# Altium PCB XL991XT10W.PcbDoc (part 1 of 2)
Units mm, origin at the board's own origin, x right, y up, seen from the top; angles counter-clockwise.
Board outline 52.36 x 73.42 mm, 5 copper layers (Top Layer, Mid-Layer 2, Mid-Layer 6, Mid-Layer 13, Bottom Layer); 103 components, 66 nets, 312 pads, 177 vias.
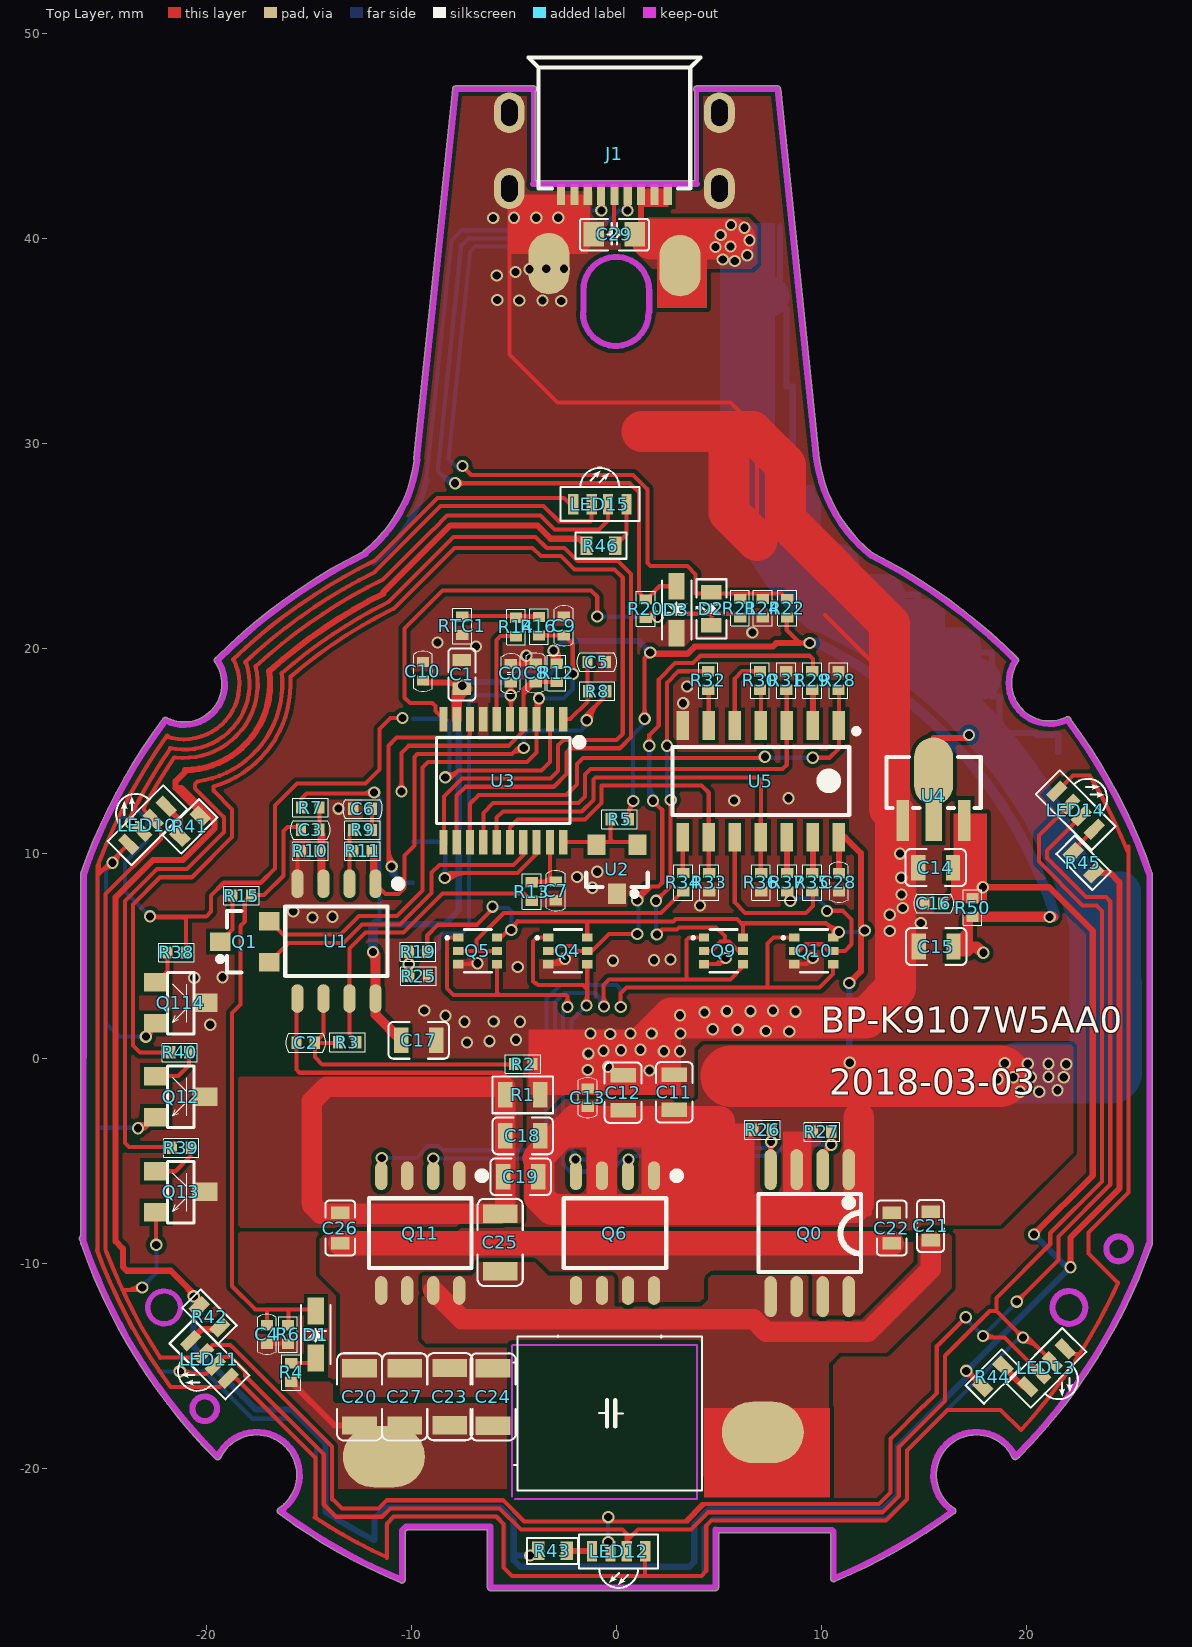
[diagram p0: Top Layer view]
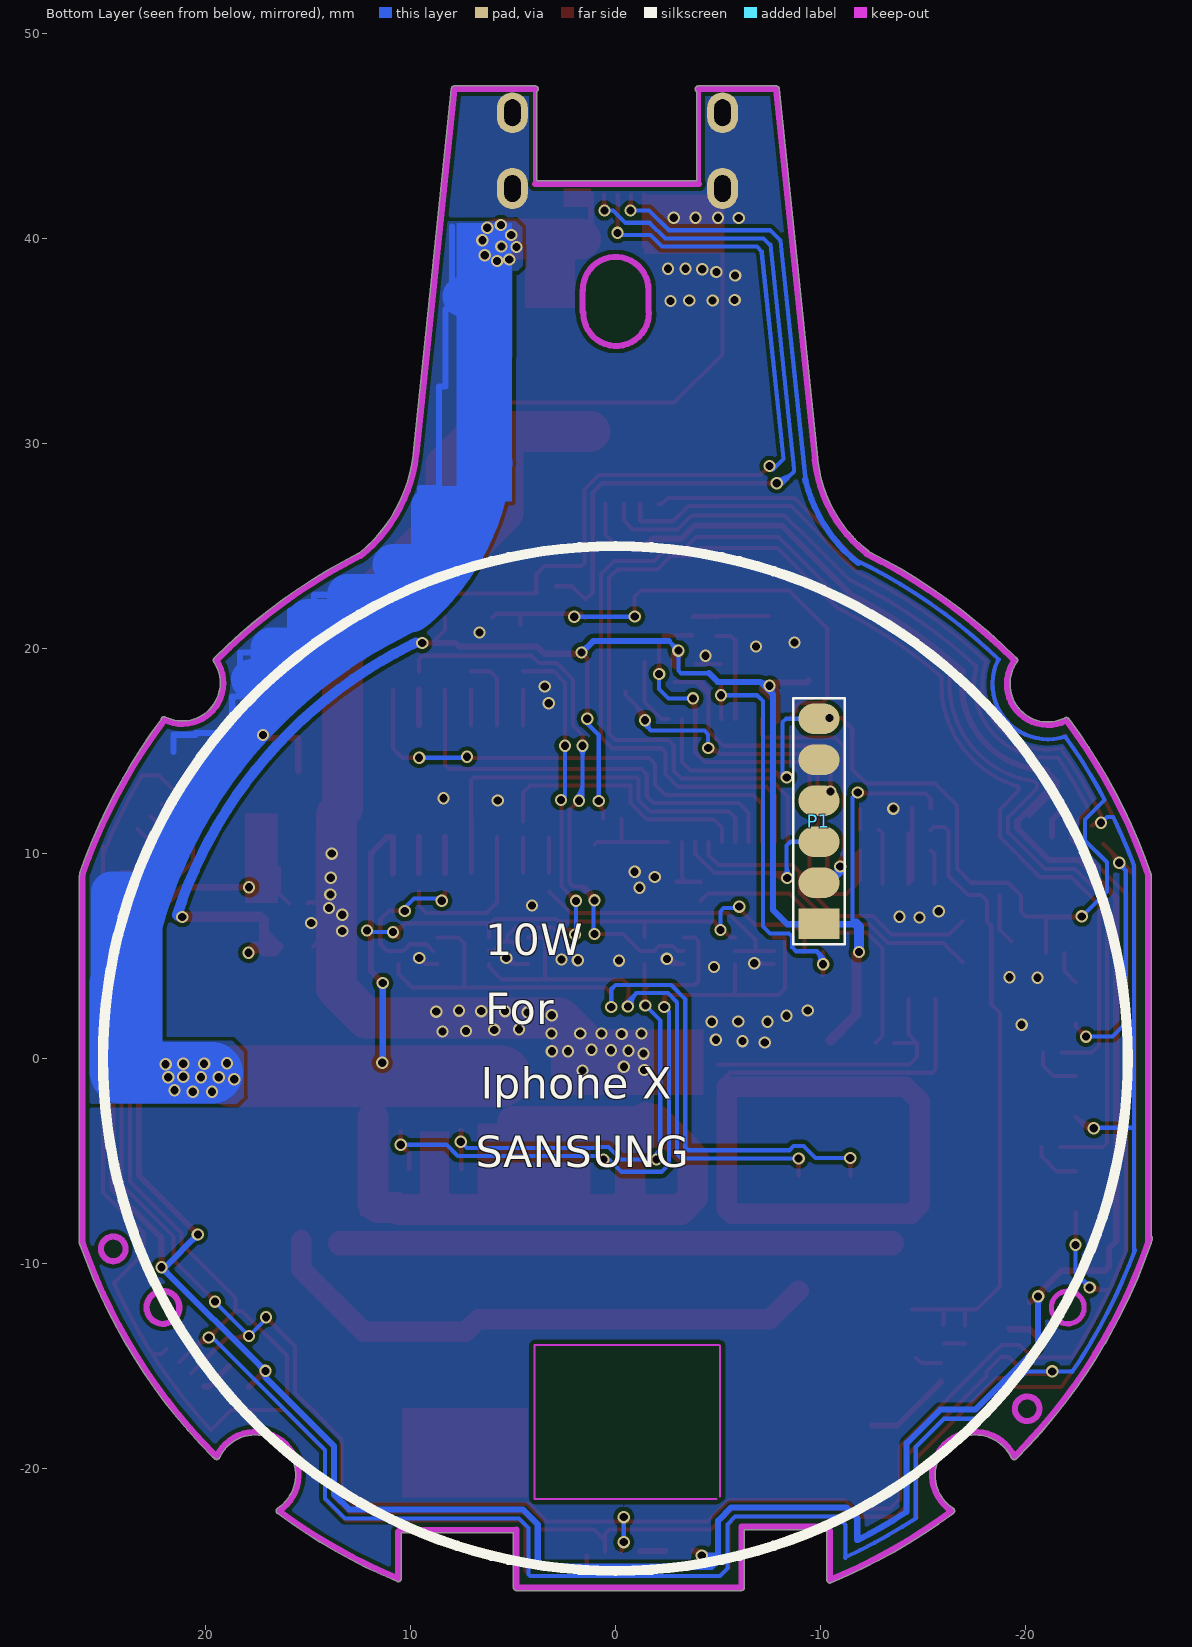
[diagram p1: Bottom Layer view, seen from below]
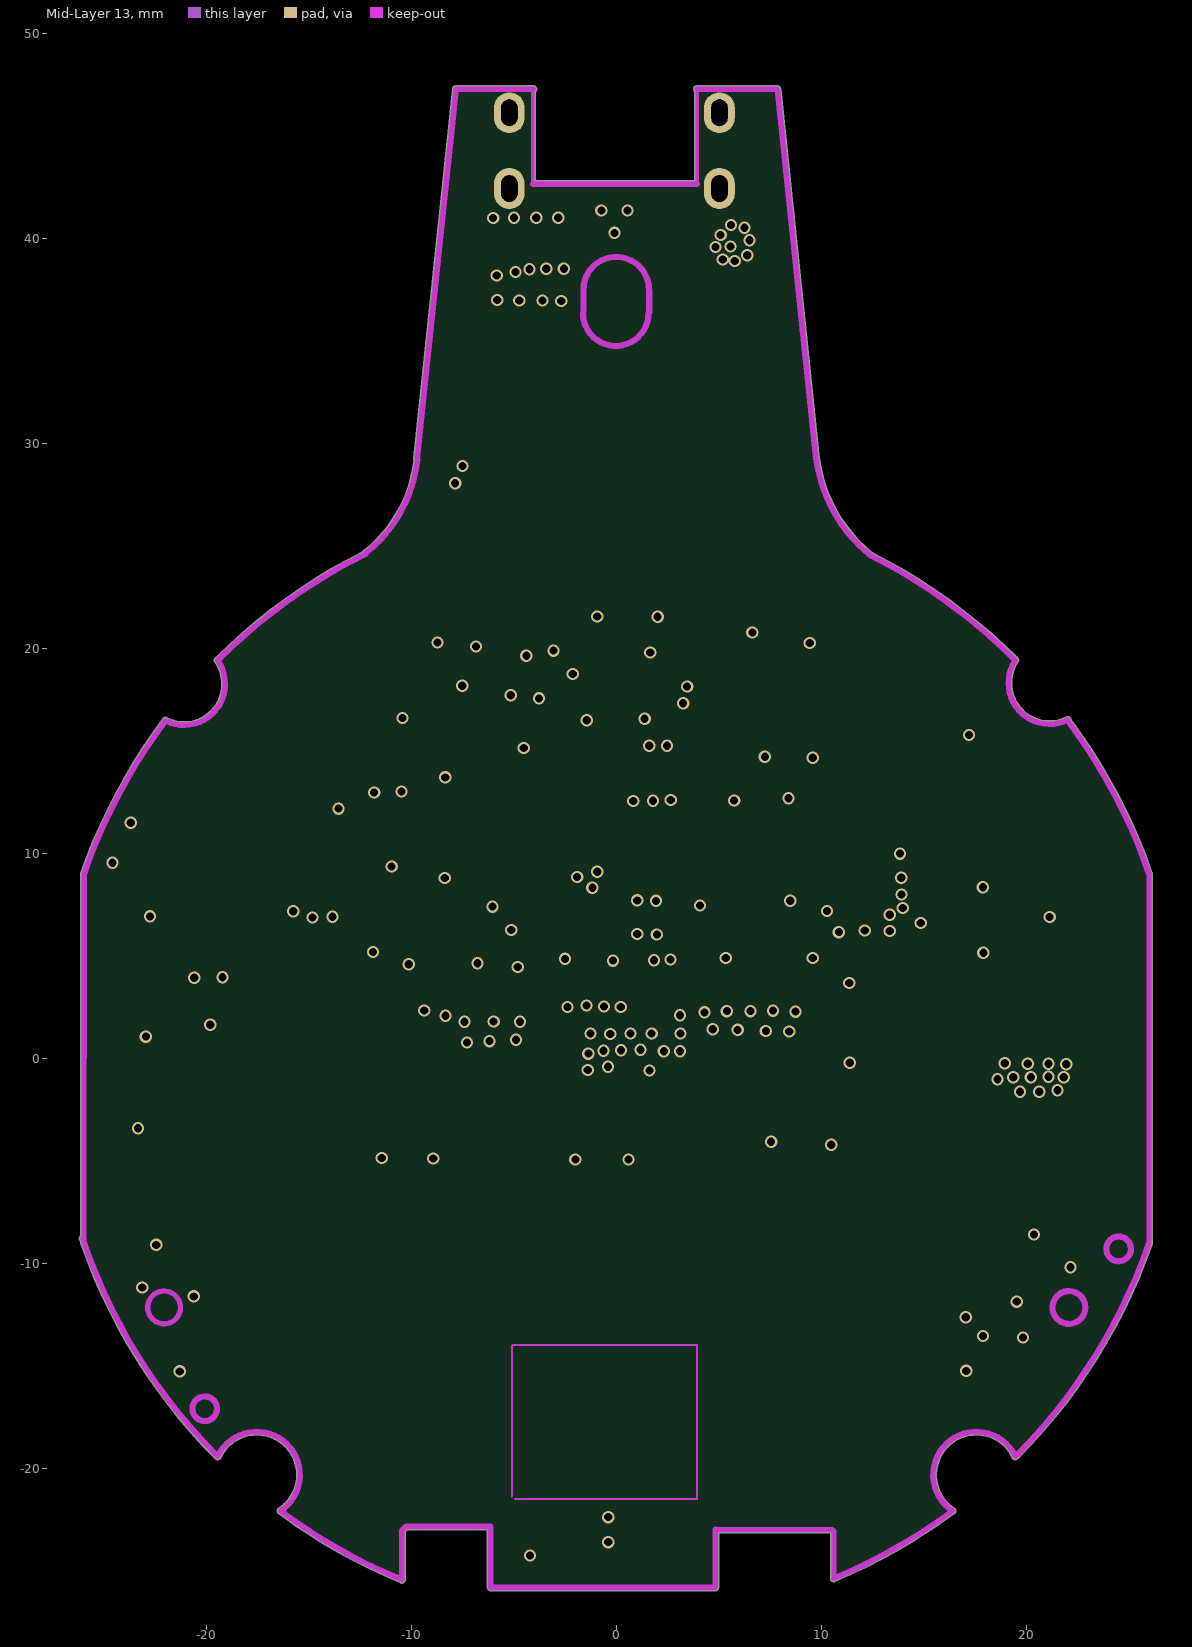
[diagram p2: Mid-Layer 13]

## Layer stack, top to bottom
Top Layer: signal copper 0.0356
Dielectric: dielectric 0.32, FR-4, Dk 4.8
Mid-Layer 2: signal copper 0.0356
Dielectric: dielectric 0.32, FR-4, Dk 4.8
Mid-Layer 6: signal copper 0.0356
Dielectric: dielectric 0.32, FR-4, Dk 4.8
Mid-Layer 13: signal copper 0.0356
Dielectric: dielectric 0.32, FR-4, Dk 4.8
Bottom Layer: signal copper 0.0356

## Board outline
-16.494,-22.19 cw(c-16.401,-22.071) -16.484,-21.945 ccw(c-17.552,-20.315) -15.603,-20.315 ccw(c-17.552,-20.315) -19.315,-19.482 cw(c-19.451,-19.417) -19.349,-19.527 cw(c-19.458,-19.425) -19.565,-19.531 cw(c0.004,0.003) -26.116,-9.066 cw(c-26.001,-8.97) -26.151,-8.97 -26.151,-8.966 cw(c0.004,0.003) -26.197,-8.829 cw(c-26.055,-8.781) -26.151,-8.665 -26.133,8.937 cw(c-25.983,8.937) -26.133,8.945 cw(c-25.988,8.985) -26.13,9.034 cw(c0.004,0.003) -22.126,16.58 cw(c-22.006,16.49) -21.912,16.607 ccw(c-21.103,18.271) -19.254,18.271 ccw(c-21.103,18.271) -19.598,19.345 cw(c-19.476,19.433) -19.528,19.574 cw(c-19.411,19.479) -19.518,19.585 cw(c0.004,0.003) -12.37,24.73 cw(c-12.241,24.653) -12.335,24.771 ccw(c-16.461,29.962) -9.874,29.2 cw(c-9.735,29.258) -9.885,29.273 -7.995,47.319 cw(c-7.846,47.303) -7.846,47.454 -4.049,47.454 cw(c-4.049,47.303) -3.898,47.303 cw(c-4.049,47.303) -3.973,47.173 -3.973,42.821 3.826,42.821 3.826,47.184 cw(c3.917,47.303) 3.917,47.454 7.854,47.454 cw(c7.854,47.303) 8.004,47.319 9.869,29.505 cw(c9.719,29.489) 9.87,29.489 cw(c9.719,29.489) 9.869,29.481 cw(c9.724,29.442) 9.874,29.459 ccw(c17.015,30.253) 12.493,24.668 cw(c12.456,24.523) 12.524,24.657 cw(c0.004,0.003) 19.555,19.556 cw(c19.469,19.433) 19.619,19.433 cw(c19.469,19.433) 19.594,19.349 ccw(c21.132,18.322) 21.952,16.664 cw(c22.018,16.529) 22.169,16.535 cw(c0.004,0.003) 26.129,9.061 cw(c25.987,9.011) 26.137,9.011 cw(c25.987,9.011) 26.134,8.98 cw(c26.001,8.909) 26.152,8.909 26.152,-9.012 cw(c26.001,-9.012) 26.106,-9.12 cw(c0.004,0.003) 19.661,-19.443 cw(c19.554,-19.337) 19.589,-19.483 cw(c19.454,-19.417) 19.318,-19.482 ccw(c17.555,-20.315) 16.487,-21.945 cw(c16.404,-22.071) 16.555,-22.071 cw(c16.404,-22.071) 16.494,-22.192 cw(c0.004,0.003) 10.654,-25.514 cw(c10.596,-25.375) 10.446,-25.375 10.446,-23.154 10.439,-23.147 4.978,-23.147 4.978,-25.811 cw(c4.827,-25.811) 4.827,-25.962 -6.145,-25.962 cw(c-6.145,-25.811) -6.296,-25.811 -6.296,-22.989 -10.212,-22.989 -10.315,-23.092 -10.315,-25.443 cw(c-10.466,-25.443) -10.523,-25.582 cw(c0.024,-0.022) -16.466,-22.217 cw(c-16.376,-22.097)

## Design rules (kind name [scope] priority, off if disabled: settings)
Clearance [All] p1: gap=0.2
ComponentClearance [All] p1 off: gap=0.254 collisioncheckmode=3 verticalgap=0.254 showdistances=FALSE
FabricationTestPointUsage TestPointUsage [All] p1: valid=0 allowmultiple=FALSE
FabricationTestpoint Testpoint [All] p1: side=3 testpointundercomponent=TRUE minsize=1.016 maxsize=2.54 preferedsize=1.524 minholesize=0 maxholesize=1.016 preferedholesize=0.813 testpointgrid=0.025 allowsidetop=TRUE allowsidebottom=TRUE usegrid=TRUE gridtolerance=0
HoleToHoleClearance [All] p1 off: gap=0.254 allowstackedmicrovias=TRUE
MinimumSolderMaskSliver [All] p1 off: minsoldermaskwidth=0.254
PlaneConnect [All] p1: planeconnectstyle=Direct reliefexpansion=0.508 reliefentries=4 reliefconductorwidth=0.254 reliefairgap=0.254
PolygonConnect [All] p1: connectstyle=Direct reliefconductorwidth=0.254 reliefentries=4 polygonreliefangle="90 Angle"
RoutingVias [All] p1: holewidth=0.4 width=0.6 viastyle="Through Hole" minholewidth=0.4 minwidth=0.6 maxholewidth=0.4 maxwidth=0.6
SilkToSilkClearance [All] p1 off: silktosilkclearance=0.254
SilkscreenOverComponentPads [All] p1 off: minsilkscreentomaskgap=0.254
SolderMaskExpansion [All] p1: expansion=0.102
Width [All] p1: maxlimit=5 minlimit=0.1 preferedwidth=0.2
20 further rules are at their usual default settings.

## Classes and differential pairs
component class XL_N76E003K1._MAIN: C0 C3 C4 C5 C6 C7 C8 C9 C10 C17 D1 LED10 LED11 LED12 LED13 LED14 LED15 P1 Q1 Q12 Q13 Q114 R4 R5 R6 R7 R8 R9 R10 R11 R12 R13 R14 R15 R16 R38 R39 R40 R41 R42 R43 R44 R45 R46 RTC1 U1 U2 U3
component class XL_N76E003K1._POWER_V17: C1 C2 C11 C12 C13 C14 C15 C16 C18 C19 C20 C21 C22 C23 C24 C25 C26 C27 C28 C29 D2 D3 J1 L1 Q0 Q4 Q5 Q6 Q9 Q10 Q11 R1 R2 R3 R19 R20 R21 R22 R24 R25 R26 R27 R28 R29 R30 R31 R32 R33 R34 R35 R36 R37 R50 U4 U5

## Components (designator, comment, footprint, x,y, rotation, side; value= is the part's Value field where it differs from the comment)
C0 "103" C0402#1 -5.156,18.797 r270 top
C1 "106" C0603#1 -7.544,18.739 r270 top
C2 "103" C0402#2 -15.164,0.737 r0 top
C3 "103" C0402#2 -14.938,11.125 r0 top
C4 "333" C0402#2 -17.025,-13.459 r90 top
C5 "103" C0402#2 -0.965,19.374 r180 top
C6 "104" C0402#2 -12.388,12.15 r0 top
C7 "103" C0402#2 -2.997,8.172 r270 top
C8 "104" C0402#2 -3.912,18.815 r90 top
C9 "102" C0402#2 -2.597,21.101 r270 top
C10 "104" C0402#2 -9.474,18.891 r270 top
C11 "106/16V" C0805#1 2.819,-1.651 r90 top
C12 "106/16V" C0805#1 0.325,-1.671 r90 top
C13 "104" C0402#2 -1.372,-1.905 r90 top
C14 "226" C0805#1 15.571,9.316 r180 top
C15 "226" C0805#1 15.596,5.462 r0 top
C16 "100P" C0402#2 15.471,7.595 r180 top
C17 "226" C0805#1 -9.652,0.889 r180 top
C18 "106/16V" C0805#1 -4.575,-3.771 r180 top
C19 "106/16V" C0805#1 -4.675,-5.771 r180 top
C20 "104/50V" C1206 -12.533,-16.507 r90 top
C21 "223" C0603#1 15.325,-8.171 r90 top
C22 "223" C0603#2 13.425,-8.271 r90 top
C23 "104/50V" C1206 -8.133,-16.501 r90 top
C24 "473/50V" C1206 -6.02,-16.51 r90 top
C25 "223" C1206 -5.675,-8.971 r270 top
C26 "223" C0603#2 -13.475,-8.271 r270 top
C27 "104/50V" C1206 -10.333,-16.507 r90 top
C28 "104" C0402#2 10.881,8.596 r90 top
C29 "106/16V" C0805#2 -0.102,40.208 r180 top
D1 "4148" sod323 -14.671,-13.462 r90 top
D2 "Red" LED0603 4.632,21.943 r90 top
D3 "4148" SOD323 2.927,21.892 r270 top
J1 "USB" "USB MRO04" -0.102,44.145 r0 top
LED10 "RGB" LED-RGB01 -22.885,11.379 r45 top
LED11 "RGB" LED-RGB01 -19.863,-14.681 r135 top
LED12 "RGB" LED-RGB01 0.102,-24.054 r180 top
LED13 "RGB" LED-RGB01 20.98,-15.092 r225 top
LED14 "RGB" LED-RGB01 22.403,12.116 r315 top
LED15 "RGB" LED-RGB01 -0.813,27.051 r0 top
P1 "Header 6" SPIN6 -9.931,11.576 r90 bottom
Q0 "4953" SOP8D#1 9.425,-8.521 r180 top
Q1 "2N7002" SOT-23B -18.136,5.701 r90 top
Q4 "2227" SOT363 -2.377,5.251 r270 top
Q5 "2227" SOT363 -6.777,5.251 r270 top
Q6 "4953" SOP8D#2 -0.075,-8.521 r180 top
Q9 "2227" SOT363 5.223,5.251 r270 top
Q10 "2227" SOT363 9.623,5.251 r270 top
Q11 "9926" SOP8D#2 -9.575,-8.521 r180 top
Q12 "8550" SOT-23 -21.26,-1.86 r270 top
Q13 "8550" SOT-23 -21.26,-6.502 r270 top
Q114 "8550" SOT-23 -21.26,2.712 r270 top
R1 "0.033R" R0805 -4.575,-1.771 r180 top
R2 "1K" R0402 -4.552,-0.271 r0 top
R3 "33K" R0402 -13.132,0.787 r0 top
R4 "1K" R0402 -15.865,-15.316 r270 top
R5 "2.2K" R0402 0.152,11.678 r180 top
R6 "33K" R0402 -16.029,-13.462 r90 top
R7 "100K" R0402 -14.935,12.243 r0 top
R8 "1K" R0402 -0.94,17.926 r0 top
R9 "33K" R0402 -12.388,11.15 r180 top
R10 "68K" R0402 -14.938,10.125 r180 top
R11 "1M" R0402 -12.388,10.125 r180 top
R12 "10K" R0402 -2.921,18.815 r270 top
R13 "1K" R0402 -4.14,8.147 r270 top
R14 "1K" R0402 -4.902,21.058 r270 top
R15 "68K" R0402 -18.288,7.95 r180 top
R16 "10K" R0402 -3.785,21.087 r90 top
R19 "10K" R0402 -9.682,5.207 r0 top
R20 "4.7K" R0402 1.432,21.942 r90 top
R21 "4.7K" R0402 6.032,21.973 r270 top
R22 "10K" R0402 8.332,21.973 r270 top
R24 "2.2K" R0402 7.132,21.973 r90 top
R25 "10K" R0402 -9.652,4.025 r180 top
R26 "100K" R0402 7.125,-3.471 r0 top
R27 "100K" R0402 10.025,-3.571 r180 top
R28 "100K" R0402 10.831,18.446 r90 top
R29 "1K" R0402 9.556,18.446 r90 top
R30 "1K" R0402 7.006,18.446 r90 top
R31 "100K" R0402 8.281,18.446 r90 top
R32 "1K" R0402 4.481,18.446 r90 top
R33 "100K" R0402 4.531,8.596 r270 top
R34 "1K" R0402 3.256,8.596 r270 top
R35 "1K" R0402 9.556,8.596 r90 top
R36 "100K" R0402 7.056,8.596 r270 top
R37 "1K" R0402 8.331,8.596 r270 top
R38 "1K" R0402 -21.463,5.176 r0 top (schematic designator R31)
R39 "1K" R0402 -21.234,-4.349 r180 top (schematic designator R31)
R40 "1K" R0402 -21.311,0.299 r180 top
R41 "220" R0603 -20.803,11.328 r225 top
R42 "220" R0603 -19.856,-12.598 r315 top
R43 "220" R0603 -3.124,-24.028 r0 top
R44 "220" R0603 18.364,-15.519 r45 top
R45 "220" R0603 22.784,9.55 r135 top
R46 "220" R0603 -0.762,25.019 r0 top
R50 "10R" R0402 17.371,7.366 r270 top
RTC1 "103J" R0402 -7.522,21.109 r90 top
U1 "LM358" SOP8 -13.663,5.725 r180 top locked
U2 "TL431" SOT-23-431 0.025,9.239 r180 top
U3 "N76E003" SOP20 -5.522,13.558 r270 top
U4 "7150" SOT89a 15.471,12.816 r0 top
U5 "4069" SOP14 6.406,13.521 r270 top locked
? "" C7090 -0.33,-17.323 r0 top

## Footprints (in the part's own frame and the unit in brackets; to place one, negate y for a bottom-side part, rotate by r counter-clockwise, add the part's x,y. Pads: shape width x height; smd on the part's side, far side on the other; paste and mask are expansions set on the pad)
C0402#1 [mm]
  rect 0.5x0.6 smd: 1(-0.45,0) 2(0.45,0)
  silkscreen extent -0.95,-0.46 0.99,0.46
C0402#2 [mm] "1.0x0.5mm"
  rect 0.5x0.6 smd: 1(-0.454,0.029) 2(0.446,0.029)
  silkscreen extent -0.98,-0.43 0.97,0.49, body extent -0.5,-0.27 0.5,0.33, height 0.22
C0603#1 [mm]
  rect 0.6x0.9 smd: 1(-0.7,0) 2(0.7,0)
  silkscreen extent -1.27,-0.66 1.27,0.66, body extent -0.8,-0.4 0.8,0.4, height 0.4
C0603#2 [mm]
  rect 0.6x0.9 smd: 1(-0.75,0) 2(0.75,0)
  silkscreen extent -1.34,-0.72 1.34,0.72, body extent -0.8,-0.4 0.8,0.4, height 0.32
C0805#1 [mm]
  rect 0.7x1.25 smd: 1(-0.85,0) 2(0.85,0)
  silkscreen extent -1.47,-0.9 1.47,0.9, body extent -1,-0.62 1,0.63, height 0.8
C0805#2 [mm]
  rect 1x1.2 smd: 1(-1,0) 2(1,0)
  silkscreen extent -1.68,-0.76 1.68,0.79, body extent -1,-0.63 1,0.62, height 0.3
C1206 [mm]
  rect 0.9x1.7 smd: 1(-1.4,0) 2(1.4,0)
  silkscreen extent -2.13,-1.1 2.13,1.1, body extent -1.6,-0.8 1.6,0.8, height 1.02
C7090 [mm]
  silkscreen extent -4.7,-3.75 4.5,3.81
LED0603 [mm]
  rect 0.7x1 smd mask+0.05: 1(-0.8,0) 2(0.8,0)
  silkscreen extent -1.44,-0.73 1.44,0.76
LED-RGB01 [mm]
  rect 0.5x1 smd: 1(1.3,0) 2(0.4,0) 3(-0.4,0) 4(-1.3,0)
  silkscreen extent -1.92,-0.82 1.93,1.77
R0402 [mm]
  rect 0.5x0.6 smd: 1(-0.45,0) 2(0.45,0)
  silkscreen extent -0.86,-0.46 0.86,0.46
R0603 [mm]
  rect 0.6x0.9 smd: 1(-0.7,0) 2(0.7,0)
  silkscreen extent -1.24,-0.63 1.24,0.63, body extent -0.8,-0.42 0.8,0.38, height 0.4
R0805 [mm]
  rect 0.7x1.25 smd: 1(-0.85,0) 2(0.85,0)
  silkscreen extent -1.48,-0.9 1.48,0.9, body extent -1,-0.63 1,0.63, height 0.55
sod323 [mm] "0805"
  rect 1.3x0.8 smd: 1(-1.15,0) 2(1.14,0)
  silkscreen extent -1.44,-0.72 1.44,0.73, body extent -1.3,-0.65 1.3,0.65, height 1
SOD323 [mm] "0805"
  rect 1.3x0.8 smd: 1(-1.15,0) 2(1.14,0)
  silkscreen extent -1.44,-0.72 1.44,0.73, body extent -1.3,-0.65 1.3,0.65, height 1
SOP8 [mm]
  oval 0.6x1.4 smd: 1(-1.905,-2.8) 2(-0.635,-2.8) 3(0.635,-2.8) 4(1.905,-2.8) 5(1.905,2.8) 6(0.635,2.8) 7(-0.635,2.8) 8(-1.905,2.8)
  silkscreen extent -3.11,-2.91 2.5,1.7, body extent -2.5,-3.03 2.52,3.01, height 1.6
SOP8D#1 [mm]
  oval 0.6x2 smd: B1(-0.635,-3.1) B2(1.905,-3.1) C1(-1.905,3.1) C1(-0.635,3.1) C2(0.635,3.1) C2(1.905,3.1) E1(-1.905,-3.1) E2(0.635,-3.1)
  silkscreen extent -2.5,-1.9 2.5,1.9
SOP8D#2 [mm]
  oval 0.6x1.4 smd: B1(-0.635,-2.8) B2(1.905,-2.8) C1(-1.905,2.8) C1(-0.635,2.8) C2(0.635,2.8) C2(1.905,2.8) E1(-1.905,-2.8) E2(0.635,-2.8)
  silkscreen extent -3.11,-2.91 2.5,1.7, body extent -2.5,-3.02 2.52,3.02, height 1.6
SOP14 [mm]
  rect 1.4x0.6 smd: 1(-2.725,4.445) 2(-2.725,3.175) 3(-2.725,1.905) 4(-2.725,0.635) 5(-2.725,-0.635) 6(-2.725,-1.905) 7(-2.725,-3.175) 8(2.725,-3.175) 9(2.725,-1.905) 10(2.725,-0.635) 11(2.725,0.635) 12(2.725,1.905) 13(2.725,3.175) 14(2.725,4.445)
  silkscreen extent -2.57,-3.68 1.65,5.42, body extent -3.06,-3.7 3.14,5, height 1.61
SOP20 [mm]
  rect 1.2x0.4 smd: 1(-3,2.925) 2(-3,2.275) 3(-3,1.625) 4(-3,0.975) 5(-3,0.325) 6(-3,-0.325) 7(-3,-0.975) 8(-3,-1.625) 9(-3,-2.275) 10(-3,-2.925) 11(3,-2.925) 12(3,-2.275) 13(3,-1.625) 14(3,-0.975) 15(3,-0.325) 16(3,0.325) 17(3,0.975) 18(3,1.625) 19(3,2.275) 20(3,2.925)
  silkscreen extent -2.1,-3.25 2.1,3.81, body extent -3.28,-3.3 3.27,3.3, height 1.2
SOT89a [mm] "7133"
  rect 0.8x2 smd: Vin(0,-1.2)
  oval 1.9x3.3 smd: Vin(0,1.2)
  rect 0.6x2 smd: Vout(1.5,-1.2) Vss(-1.5,-1.2)
  silkscreen extent -2.3,-0.6 2.3,1.9, body extent -2.25,-1.76 2.25,2.54, height 1.51
SOT363 [mm]
  rect 0.4x0.5 smd: 1(-0.65,-0.95) 2(0,-0.95) 3(0.65,-0.95) 4(0.65,0.95) 5(0,0.95) 6(-0.65,0.95)
  silkscreen extent -1.04,-1.49 1.04,0.68
SOT-23 [mm]
  rect 0.9x1.2 smd: B(-1,-1.2) C(0,1.2) E(1,-1.2)
  silkscreen extent -1.48,-0.65 1.52,0.65
SOT-23-431 [mm]
  rect 0.9x1 smd: 1(0,1.2) 2(-1,-1.2) 3(1,-1.2)
  silkscreen extent -1.5,0.18 1.5,1.32, body extent -1.5,-1.4 1.5,1.4, height 1.2
SOT-23B [mm]
  rect 0.9x1 smd: B(-1,-1.2) C(0,1.2) E(1,-1.2)
  silkscreen extent -1.5,0.17 1.5,1.32, body extent -1.45,-1.4 1.45,1.4, height 1.2
SPIN6 [mm]
  rect 1.5x2 smd paste-200: 1(-5,0)
  oval 1.5x2 smd paste-200: 2(-3,0) 3(-1,0) 4(1,0) 5(3,0) 6(5,0)
  silkscreen extent -6,-1.25 6,1.25
"USB MRO04" [mm]
  rect 0.4x1 smd: 1(1.3,-2) 1(1.95,-2) 1(2.6,-2) 2(0.65,-2) 3(0,-2) 4(-0.65,-2) 5(-1.3,-2) 6(-2.6,-2) 6(-1.95,-2)
  oval 1.5x2 hole 0.8 slot 1.3 at 90 deg: 6(-5.125,-1.7) 6(-5.125,2) 6(5.125,-1.7) 6(5.125,2)
  silkscreen extent -4.2,-1.7 4.2,4.7

## Part data
C0 C1 C2 C5 C7 C8 C9 C10 C13 C16 C21 C22 C25 C26 C28: library part Cap, "Capacitor"
C3 C4 C6 C11 C12 C14 C15 C17 C18 C19 C20 C23 C24 C27 C29: library part CH
D1 D3: library part D0, "1N4001"
D2: library part LED02
J1: library part USB5P
LED10 LED11 LED12 LED13 LED14 LED15: library part LED05
P1: "Header, 6-Pin"
Q0 Q6: library part MOSFETP2
Q1: library part MOSFETN
Q4 Q5 Q9 Q10: library part N+PS
Q11: library part MOSFETN2
Q12 Q13 Q114: library part PNP
R1 R3 R5 R6 R7 R9 R10 R11 R15 R16 R19 R20 R21 R22 R24 R25 R26 R27 R28 R31 R33 R36: library part R, "1K"
R2 R4 R8 R12 R13 R14 R29 R30 R32 R34 R35 R37 R38 R39 R40: library part R
R41 R42 R43 R44 R45 R46 R50: library part Res01
RTC1: library part RTC
U1: library part 4558
U2: library part "IC TL431", "IC"
U3: library part 103F
U4: library part VOLTREG
U5: library part CD4069

## Free pads (board coordinates)
  oval 4x3 smd: 0(-11.351,-19.431) 0(7.139,-18.237)
  oval 2x3 smd: 2(-3.302,38.786) 2(3.099,38.684)

## Via types
v1: diameter 0.6, hole 0.4, Top Layer to Bottom Layer, 177 vias

## Nets (pads, with @x,y where several pads share a name; then routed paths per layer and width w, separated by ;. In a path a pad name is that pad's centre, name@x,y a point inside that pad or via, vN(x,y) a via of type N, cw(c..) or ccw(c..) an arc to the next point about the centre after c; other vN are vias at no path point)
5V: C14.1 C16.1 R41.1 R42.1 R43.1 R44.1 R45.1 R46.1 R50.1 U4.Vout | length 186.1
  Top Layer w0.2: C16.1@15.925,7.566 16.421,8.062 16.421,8.391 ; R50.1@17.146,7.666 16.421,8.391 ; v1@17.735,8.215 ccw(c17.393,7.874) 17.393,8.357 ccw(c17.393,8.84) v1@17.735,8.498 ; v1(17.876,8.357) 17.38,8.357 C14.1@16.421,9.316 16.421,8.391
  Top Layer w0.3: -21.059,14.071 ccw(c-21.103,18.271) -16.952,18.906 ; -21.012,14.024 -21.51,13.526 -21.51,13.205 ; -20.97,-11.136 cw(c-21.441,-11.607) v1@-20.775,-11.607 ; v1@-20.601,-11.755 cw(c-20.533,-12.177) R42.1@-20.231,-11.874 ; R42.1@-20.231,-11.874 -21.752,-10.354 -23.892,-10.354 -24.083,-10.163 -24.083,-9.273 -24.441,-8.915 -24.441,7.867 -22.614,9.693 -21.143,9.693 -19.609,11.227 -19.609,11.582 -21.231,13.205 -21.51,13.205 ; R41.1@-20.189,11.883 -21.51,13.205 ; -16.901,18.935 cw(c0.004,-0.022) -11.376,22.686 ; -11.394,22.723 -11.206,22.911 -11.205,22.911 -8.106,26.01 -3.862,26.01 -3.215,25.363 -1.806,25.363 R46.1@-1.462,25.019 ; v1(-4.216,-24.249) -4.216,-24.23 -4.014,-24.028 R43.1@-3.824,-24.028 ccw(c-3.824,-24.271) R43.1@-4.067,-24.257 ; v1@16.993,-15.138 R44.1@17.869,-16.014 ; v1@17.069,-15.39 cw(c17.069,-15.815) 17.369,-15.514 ; v1@17.219,-15.24 ccw(c17.518,-15.24) 17.306,-15.452 ; v1@17.968,8.475 cw(c18.233,8.814) 17.803,8.814 17.803,8.43 v1(17.876,8.357) 21.107,8.357 23.241,6.223 23.241,-5.715 v1(20.371,-8.585) ; v1@17.982,8.251 cw(c18.238,7.995) 18.238,8.357 cw(c18.238,8.719) v1@17.982,8.463 ; v1@20.371,-8.435 ccw(c20.371,-8.073) 20.627,-8.329 ccw(c20.883,-8.585) v1@20.521,-8.585 ; v1@22.043,-10.079 ccw(c21.787,-9.823) 22.149,-9.823 ccw(c22.511,-9.823) v1@22.255,-10.079 ; v1(22.149,-10.185) 22.149,-8.736 24.541,-6.344 24.541,8.611 24.096,9.055 R45.1@23.279,9.055
  Top Layer w1: 17.469,10.364 17.469,11.118
  Bottom Layer w0.3: v1@-20.731,-11.713 cw(c-20.987,-11.969) -20.625,-11.969 cw(c-20.263,-11.969) v1@-20.519,-11.713 ; v1(-20.625,-11.607) -20.625,-14.07 -17.568,-17.127 -15.841,-17.127 -14.206,-18.762 -14.206,-22.027 ; -14.199,-22.132 ccw(c0.004,0.003) -11.8,-23.499 -11.8,-22.443 -11.259,-21.902 -5.656,-21.902 -5.011,-22.547 -5.011,-24.249 ; v1@-4.322,-24.355 ccw(c-4.579,-24.611) -4.579,-24.249 ccw(c-4.579,-23.886) v1@-4.322,-24.143 ; v1(-4.216,-24.249) -5.011,-24.249 ; v1@16.97,-15.353 cw(c16.783,-15.569) 17.069,-15.569 ; v1(17.069,-15.24) v1@17.069,-15.265 ; v1@17.069,-15.09 ccw(c17.069,-14.667) 17.368,-14.966 ; v1@17.167,-15.353 ccw(c17.354,-15.569) 17.069,-15.569 ; v1@17.219,-15.24 cw(c17.52,-15.24) 17.307,-15.027 ; v1@20.371,-8.735 cw(c20.371,-9.097) 20.627,-8.841 cw(c20.883,-8.585) v1@20.521,-8.585 ; v1(20.371,-8.585) 21.971,-10.185 v1(22.149,-10.185) v1@17.069,-15.265 ; v1@21.999,-10.185 cw(c21.637,-10.185) 21.893,-10.441 cw(c22.149,-10.698) v1@22.149,-10.335 ; -5.011,-24.249 -5.011,-24.486 -4.699,-24.798 3.556,-24.798 3.792,-24.562 3.792,-22.724 4.513,-22.004 12.996,-22.004 13.723,-21.277 13.723,-18.914 17.069,-15.569 ; 17.069,-15.569 v1@17.069,-15.265
A_PWM: R28.1 U3.13 U5.1 | length 24.5
  Top Layer w0.2: U3.13@-7.147,10.558 -7.147,12.43 -6.719,12.858 -2.452,12.858 -1.93,13.379 -1.93,14.37 -1.643,14.658 7.171,14.658 v1(7.239,14.726) ; v1(9.576,14.675) 10.391,14.675 10.851,15.135 U5.1@10.851,16.246 10.851,17.991 R28.1@10.856,17.996
  Bottom Layer w0.2: v1(7.239,14.726) 7.29,14.675 v1(9.576,14.675)
"AMP AD": R3.2 R13.2 U1.7 | length 14.9
  Top Layer w0.2: R3.2@-12.682,0.762 -13.028,1.109 U1.7@-13.028,2.925 -13.028,5.361 -12.243,6.147 -10.389,6.147 -8.49,8.045 -4.514,8.045 R13.2@-4.165,7.697
B: LED10.2 LED11.2 LED12.2 LED13.2 LED14.2 LED15.2 Q13.E | length 158.8
  Top Layer w0.2: -24.924,-9.326 -24.924,8.02 -22.225,10.719 -22.225,11.125 -22.603,11.503 LED10.2@-22.603,11.662 -23.061,12.12 -23.061,12.218 cw(c0.004,0.003) -21.573,14.687 ; -24.902,-9.389 ccw(c0.004,-0.047) -22.26,-14.603 ; -24.089,-11.303 -23.267,-11.303 v1(-23.139,-11.176) cw(c-23.447,-10.869) -23.447,-11.303 ; -23.929,-11.303 ccw(c-23.929,-10.386) v1@-23.281,-11.035 ; Q13.E@-22.46,-7.502 -22.46,-9.087 v1(-22.454,-9.093) ; -22.243,-14.592 -20.34,-14.592 LED11.2@-20.146,-14.398 -19.717,-13.97 -18.847,-13.97 -18.661,-14.156 -18.656,-14.156 -13.881,-18.93 -13.881,-21.514 -13.839,-21.514 -13.395,-21.958 -11.609,-21.958 -11.203,-21.552 -5.536,-21.552 -4.501,-22.587 3.335,-22.587 ; -21.512,14.694 ccw(c-21.103,18.271) -17.609,19.137 ; -17.605,19.132 cw(c0.004,0.003) -11.394,23.372 -8.953,25.813 -8.939,25.813 -8.26,26.492 -3.708,26.492 -3.029,25.813 -0.847,25.813 -0.413,26.247 LED15.2@-0.413,27.051 ; LED12.2@-0.486,-23.78 cw(c-0.611,-24.066) LED12.2@-0.298,-24.066 ; v1(-0.406,-23.597) -0.406,-23.552 -0.298,-23.66 LED12.2@-0.298,-24.054 ; 4.256,-21.795 3.464,-22.587 3.335,-22.587 ; v1(17.043,-12.624) 15.627,-14.04 15.627,-16.312 14.972,-16.967 14.961,-16.967 13.373,-18.555 13.373,-21.182 12.815,-21.741 4.181,-21.741 3.335,-22.587 ; v1(17.879,-13.536) 17.869,-13.546 17.869,-13.589 17.895,-13.614 18.937,-13.614 LED13.2@20.698,-15.374 ; v1@18.021,-13.677 cw(c18.172,-13.829) 18.172,-13.614 ; v1@18.021,-13.394 ccw(c18.552,-12.863) 18.552,-13.614 ; v1(19.533,-11.862) 21.565,-9.83 21.565,-8.684 24.091,-6.158 24.091,7.659 23.876,7.874 22.911,7.874 21.006,9.779 21.006,10.153 LED14.2@22.686,11.833 ; v1@19.533,-11.662 ccw(c19.533,-11.179) 19.874,-11.52 ccw(c20.215,-11.862) v1@19.733,-11.862
  Bottom Layer w0.2: v1(-23.139,-11.176) -23.139,-11.125 -22.454,-10.439 v1(-22.454,-9.093) ; v1@-23.139,-10.976 ccw(c-23.139,-10.616) -22.885,-10.871 ; v1@-22.939,-11.176 cw(c-22.334,-11.176) -22.762,-10.748 ; v1(-0.406,-23.597) v1(-0.406,-22.377) ; v1(17.043,-12.624) 17.094,-12.675 17.094,-12.751 v1(17.879,-13.536) 19.533,-11.882 v1(19.533,-11.862)
B_PWM: R33.1 U3.16 U5.9 | length 15.1
  Top Layer w0.2: U3.16@-5.197,10.558 -5.197,11.281 -4.821,11.658 -1.53,11.658 -0.73,12.457 -0.73,13.316 4.153,13.316 4.501,12.968 4.501,11.562 ; U5.9@4.501,10.796 4.501,9.051 R33.1@4.506,9.046
BLUE: R39.2 U3.12 | length 71.6
  Top Layer w0.2: R39.2@-21.684,-4.324 -23.793,-4.324 -23.991,-4.127 -23.991,7.681 -22.428,9.243 -20.956,9.243 -19.159,11.04 -19.159,11.769 -20.574,13.184 -20.574,13.383 -20.44,13.517 ccw(c-21.103,18.271) -16.333,18.803 ; -16.321,18.805 cw(c0.004,0.003) -11.146,22.267 ; -11.132,22.281 -7.96,25.453 -3.942,25.453 -3.402,24.913 -2.535,24.913 -1.892,24.269 0.071,24.269 0.705,23.635 0.705,15.678 0.166,15.138 -2.237,15.138 -2.447,14.929 -2.447,13.872 -3.061,13.258 -7.373,13.258 -7.797,12.834 U3.12@-7.797,10.558
CLK: P1.3 U3.18 | length 11.6
  Top Layer w0.2: v1@-8.323,8.999 ccw(c-8.272,9.167) -8.147,9.042 ; v1@-8.241,8.666 cw(c-7.332,7.757) -7.332,9.042 ; v1@-8.191,8.866 cw(c-8.022,8.918) -8.147,9.042 ; -7.815,9.042 ccw(c-7.815,8.24) v1(-8.382,8.807) -8.147,9.042 ; U3.18@-3.897,10.558 -3.897,9.983 -4.838,9.042 -8.147,9.042
  Bottom Layer w0.2: P1.3@-9.931,10.576 -8.544,10.576 -8.357,10.389 -8.357,8.833 v1(-8.382,8.807) ; v1@-8.523,8.949 ccw(c-8.926,9.352) -8.357,9.352 ; -8.357,9.229 ccw(c-7.96,9.229) v1@-8.241,8.949
CODE2_DET: C9.2 Q1.E R16.1 U3.3 | length 31.4
  Top Layer w0.2: Q1.E@-16.936,6.701 -16.279,6.045 -13.476,6.045 -12.574,6.947 -10.72,6.947 -9.461,8.206 -9.461,14.192 -9.196,14.458 -4.372,14.458 -3.897,14.933 U3.3@-3.897,16.558 -3.897,17.39 -3.665,17.621 -3.734,17.621 v1(-3.785,17.57) ; U3.3@-3.897,16.817 cw(c-3.031,16.817) v1@-3.643,17.429 ; -3.302,20.655 -3.742,20.655 -3.76,20.637 C9.2@-2.55,20.637 ; C9.2@-2.568,20.655 C9.2@-2.55,20.637 ; C9.2@-2.346,20.637 C9.2@-2.55,20.637 ; v1@-2.275,18.906 ccw(c-2.616,19.247) -2.134,19.247 ccw(c-1.651,19.247) v1@-1.992,18.906 ; v1(-2.134,18.764) -2.134,20.221 C9.2@-2.55,20.637
  Bottom Layer w0.2: v1(-3.785,17.57) -2.591,17.57 -2.134,18.028 v1(-2.134,18.764)
CODE_DET: R8.2 R11.1 U1.1 | length 26.2
  Top Layer w0.2: -4.89,15.075 cw(c-4.649,14.834) v1(-4.527,15.151) -4.813,15.151 -5.107,14.858 ; v1@-4.599,14.965 ccw(c-4.771,14.521) -5.107,14.858 ; -1.25,16.981 ccw(c-0.773,16.504) v1(-1.448,16.504) -1.473,16.504 -1.6,16.631 -0.49,17.741 R8.2@-0.49,17.901 ; v1@-1.248,16.504 cw(c-0.09,16.504) -0.909,17.322 ; U1.1@-11.758,8.525 -11.938,8.705 -11.938,10.15 -11.758,9.97 U1.1@-11.758,8.525 ; U1.1@-11.758,8.525 -11.269,8.036 -10.633,8.036 -10.338,8.332 -10.338,9.906 -9.861,10.383 -9.861,14.718 -9.722,14.858 -5.107,14.858
  Bottom Layer w0.2: v1(-4.527,15.151) -4.527,15.812 -4.343,15.996 -1.727,15.996 ; v1@-1.635,16.432 cw(c-2.017,16.285) -1.727,15.996 ; v1(-1.448,16.504) -1.448,16.275 -1.727,15.996
COM: J1.4 P1.6 R38.2 U3.2 | length 88.8
  Top Layer w0.2: R38.2@-21.013,5.151 -21.013,6.787 -21.11,6.883 ; v1(-10.439,16.612) -11.024,16.612 -11.557,16.078 -11.557,14.097 -12.243,13.411 -15.594,13.411 -16.662,12.342 -16.662,9.271 -17.358,8.575 -19.162,8.575 -19.787,7.95 -19.787,7.163 -20.015,6.934 -21.161,6.934 ; v1@-8.299,13.908 ccw(c-8.127,14.48) -7.704,14.058 ; v1@-8.175,13.633 cw(c-8.046,13.575) -8.046,13.716 ; v1@-8.175,13.799 ccw(c-8.046,13.857) -8.046,13.716 ; -7.941,13.821 cw(c-8.237,14.116) v1(-8.357,13.716) -8.046,13.716 ; U3.2@-3.247,16.558 -3.247,14.476 -3.665,14.058 -7.704,14.058 -8.046,13.716 ; v1@-0.878,41.518 ccw(c-1.183,41.823) J1.4@-0.752,41.823 ; v1@-0.752,41.377 J1.4@-0.752,42.145 ; J1.4@-0.752,41.896 ccw(c-0.218,41.896) v1@-0.595,41.518 ; -21.161,6.934 -21.11,6.883 ; -21.161,6.934 v1(-22.758,6.934) -22.708,6.883 -21.11,6.883
  Bottom Layer w0.2: v1(-22.758,6.934) -23.978,8.153 -23.978,9.576 -22.911,10.643 -22.911,11.657 -23.869,12.615 cw(c0.004,0.003) -21.957,15.71 ccw(c-21.103,18.271) -18.664,19.429 ; -18.704,19.471 cw(c0.004,0.003) -11.636,24.365 ; P1.6@-9.931,16.576 -8.321,16.576 -8.153,16.408 -8.153,13.782 -8.219,13.716 v1(-8.357,13.716) ; -9.306,27.977 -9.288,28.144 -8.057,39.903 ; -8.052,39.903 -7.538,40.417 ; -7.507,40.413 -2.604,40.413 -1.641,41.377 v1(-0.737,41.377)
  Bottom Layer w0.3: -11.857,24.169 ccw(c-16.461,29.962) -9.288,28.144 ccw(c-16.461,29.962) -9.264,28.244
D+: D2.2 J1.3 R21.1 R22.1 R24.2 | length 42
  Top Layer w0.2: v1(-7.518,28.908) -7.087,28.476 -7.087,28.467 0.811,28.467 1.505,27.773 1.505,24.175 1.651,24.028 3.454,24.028 3.861,23.622 3.861,22.682 8.048,22.682 R22.1@8.307,22.423 ; v1@-0.102,40.208 -0.113,40.219 -0.113,42.134 J1.3@-0.102,42.145
  Bottom Layer w0.2: v1(-7.518,28.908) -7.518,28.854 -7.62,28.753 -7.702,28.753 -8.194,29.245 -7.14,39.317 -7.14,39.38 -6.907,39.613 -2.273,39.613 -1.703,40.183 v1@-0.356,40.183 ; v1@-0.356,40.183 -0.203,40.183 v1(-0.102,40.284) -0.254,40.284 v1@-0.356,40.183
D-: D3.1 J1.2 R20.2 | length 41
  Top Layer w0.2: v1(-7.874,28.067) 0.645,28.067 1.105,27.608 1.105,22.745 1.457,22.392 2.107,23.042 D3.1@2.927,23.042 ; v1@-7.733,27.926 cw(c-7.391,27.584) -7.391,28.067 cw(c-7.391,28.55) v1@-7.733,28.208 ; v1@0.392,41.518 ccw(c0.014,41.896) J1.2@0.548,41.896 ; v1@0.548,41.377 J1.2@0.548,42.145 ; J1.2@0.548,41.823 ccw(c0.98,41.823) v1@0.675,41.518
  Bottom Layer w0.2: -8.692,28.606 ccw(c-7.874,29.424) v1@-7.874,28.267 ; -8.351,28.265 ccw(c-7.874,28.742) v1(-7.874,28.067) -8.153,28.067 -8.718,28.632 -8.718,28.787 -7.573,39.723 -7.517,39.723 -7.228,40.013 -2.439,40.013 -1.675,40.777 -0.488,40.777 0.112,41.377 v1(0.533,41.377)
DATA: P1.2 U3.8 | length 15.5
  Top Layer w0.2: -11.125,9.734 ccw(c-10.605,9.734) v1(-10.973,9.366) -11.125,9.519 -11.125,15.259 -10.727,15.658 -7.277,15.658 -7.147,15.788 U3.8@-7.147,16.558 ; -11.125,10.217 ccw(c-10.122,10.217) v1@-10.831,9.508
  Bottom Layer w0.2: v1@-11.086,9.201 cw(c-11.2,9.035) -10.998,9.035 ; v1@-10.899,9.18 ccw(c-10.842,9.035) -10.998,9.035 ; P1.2@-10.81,8.847 cw(c-10.393,9.263) v1(-10.973,9.366) -10.998,9.341 -10.998,9.036 ; v1@-10.776,9.331 ccw(c-9.933,9.182) P1.2@-10.538,8.576 ; P1.2@-9.931,8.576 P1.2@-10.538,8.576 ; -10.998,9.036 P1.2@-10.538,8.576
DOWN-A: Q9.2 Q9.5 R32.2 | length 22.5
  Top Layer w0.2: v1(1.925,7.69) 2.631,8.396 2.631,12.597 v1(2.651,12.617) ; v1@1.925,7.89 ccw(c1.925,8.373) 2.266,8.031 ccw(c2.608,7.69) v1@2.125,7.69 ; v1(1.97,6.047) 2.213,6.29 ; v1@2.023,6.24 ccw(c2.075,6.428) 2.213,6.29 ; v1@2.163,6.1 cw(c2.351,6.152) 2.213,6.29 ; v1(2.464,15.258) 2.464,18.332 3.028,18.896 R32.2@4.506,18.896 ; Q9.2@4.273,5.251 4.623,5.251 5.073,5.701 5.499,5.701 ; Q9.5@6.173,5.251 5.949,5.251 5.499,5.701 ; 2.213,6.29 2.943,6.29 3.055,6.401 4.865,6.401 5.286,5.98 5.286,5.701 5.499,5.701
  Bottom Layer w0.2: v1(1.925,7.69) 1.925,6.078 v1@1.956,6.047 ; v1(2.464,15.258) 2.464,12.805 v1(2.651,12.617)
DOWN-B: Q10.2 Q10.5 R37.2 | length 8.7
  Top Layer w0.2: v1@8.316,7.823 ccw(c8.227,7.891) R37.2@8.306,7.97 ; R37.2@8.474,7.901 cw(c8.472,8.136) R37.2@8.306,7.97 ; v1@8.475,7.801 R37.2@8.306,7.97 ; R37.2@8.512,7.898 cw(c8.559,8.146) 8.306,8.146 R37.2@8.306,7.97 ; Q10.2@8.897,5.251 9.222,5.576 10.025,5.576 10.349,5.251 Q10.5@10.573,5.251 11.149,5.251 11.473,5.576 11.473,6.783 11.049,7.207 v1@10.275,7.207
  Bottom Layer w0.2: v1@8.473,7.801 9.82,7.801 v1@10.287,7.334
  other v1: 10.275,7.201 8.475,7.701
G: LED10.3 LED11.3 LED12.3 LED13.3 LED14.3 LED15.3 Q12.E | length 215.7
  Top Layer w0.2: v1@-23.335,-3.204 ccw(c-23.291,-2.029) -22.46,-2.86 -23.003,-3.404 ; LED10.3@-23.244,11.375 -23.277,11.375 -23.718,11.815 cw(c0.004,0.003) -21.811,15.049 ; v1@-23.168,-3.5 cw(c-23.003,-3.592) -23.003,-3.404 ; v1@-23.168,-3.307 ccw(c-23.003,-3.216) -23.003,-3.404 ; Q12.E@-22.784,-3.184 cw(c-23.315,-2.654) v1(-23.343,-3.404) -23.003,-3.404 ; -21.789,15.145 ccw(c-21.103,18.271) -18.063,19.268 ; v1@-21.169,-15.124 ccw(c-20.516,-14.471) -20.516,-15.394 ; -20.999,-15.394 cw(c-20.999,-14.954) v1(-21.311,-15.265) -21.311,-15.367 -21.283,-15.394 -20.041,-15.394 LED11.3@-19.61,-14.964 ; -18.124,19.333 cw(c0.004,0.003) -11.797,23.73 -8.578,26.949 -3.563,26.949 -3.556,26.957 -2.812,26.213 -1.263,26.213 -1.213,26.263 LED15.3@-1.213,27.051 ; LED12.3@0.502,-24.054 0.502,-23.527 ; v1@19.637,-13.614 ccw(c19.155,-13.614) 19.496,-13.273 ccw(c19.837,-12.932) v1@19.837,-13.414 ; v1@19.837,-13.814 cw(c19.837,-14.856) 20.574,-14.119 ; 20.233,-13.778 ccw(c19.837,-14.173) v1(19.837,-13.614) ; LED13.3@21.263,-14.809 20.069,-13.614 v1(19.837,-13.614) ; LED14.3@22.12,12.399 20.606,10.884 20.606,9.613 22.745,7.474 23.419,7.474 23.691,7.202 23.691,-5.992 21.165,-8.518 21.165,-9.061 18.542,-11.684 18.542,-12.319 ; LED11.3@-19.61,-14.964 -19.202,-14.556 -19.172,-14.556 ; LED11.3@-19.61,-14.964 LED11.3@-19.58,-14.964 -19.172,-14.556 ; -19.172,-14.556 -18.821,-14.556 -18.113,-15.264 -18.113,-15.484 -14.281,-19.316 -14.281,-21.774 -13.697,-22.358 -11.443,-22.358 -11.037,-21.952 -5.702,-21.952 -4.667,-22.987 0.284,-22.987 0.502,-23.205 0.502,-23.527 ; 0.502,-23.527 1.041,-22.987 3.629,-22.987 4.475,-22.141 12.98,-22.141 13.773,-21.348 13.773,-18.961 16.027,-16.706 16.027,-14.503 18.212,-12.319 18.542,-12.319 ; 18.542,-12.319 v1(19.837,-13.614)
  Bottom Layer w0.2: -25.347,-9.337 ccw(c0.004,-0.047) -22.279,-15.294 ; -25.299,-9.423 -25.299,9.425 cw(c0.004,0.003) -24.287,11.792 -23.984,11.792 v1(-23.698,11.506) ; -25.299,-3.378 v1@-23.343,-3.378 ; -22.222,-15.254 -22.211,-15.265 v1(-21.311,-15.265) -20.066,-15.265 -17.755,-17.577 -16.027,-17.577 -14.656,-18.948 -14.656,-22.403 ; -14.669,-22.423 ccw(c0.004,0.003) -11.227,-24.33 ; -11.227,-24.359 -11.227,-24.33 ; -11.203,-24.341 cw(c0.004,0.003) -11.227,-24.33 ; v1(19.837,-13.614) 19.66,-13.614 14.173,-19.101 14.173,-21.463 13.183,-22.454 4.699,-22.454 4.242,-22.911 4.242,-25.171 4.166,-25.248 -5.105,-25.248 -5.486,-24.867 -5.461,-24.841 -5.461,-22.733 -5.842,-22.352 -10.82,-22.352 -11.227,-22.758 -11.227,-24.33
GND: C0.1 C1.1 C4.1 C5.1 C6.1 C7.2 C8.2 C9.1 C10.1 C11.2 C12.2 C13.2 C14.2 C15.1 C16.2 C17.1 C28.1 C29.2 D3.2 J1.5 J1.6 P1.5 pad.2@-3.302,38.786 Q4.3 Q5.3 Q9.3 Q10.3 Q12.C Q13.C Q114.C R1.1 R2.2 R6.1 R10.2 R24.1 R25.1 R28.2 R31.2 R33.2 R36.2 RTC1.1 U1.4 U2.1 U3.7 U4.Vss U5.7 | length 130.6
  Top Layer w0.2: C4.1@-17.046,-13.921 C4.1@-17.054,-13.913 -16.029,-13.913 R6.1@-16.025,-13.909 ; U1.4@-15.568,8.525 -15.568,9.97 R10.2@-15.388,10.15 ; Q5.3@-7.727,4.601 -6.982,4.601 -6.882,4.701 -6.827,4.701 v1(-6.777,4.651) ; -7.38,4.601 ccw(c-7.38,5.255) v1@-6.918,4.793 ; -7.139,4.601 cw(c-7.139,4.289) v1@-6.918,4.51 ; -5.227,40 cw(c-3.983,40) v1@-4.862,40.88 ; -5.227,40.483 cw(c-4.466,40.483) v1(-5.004,41.021) cw(c-4.466,41.559) J1.6@-5.227,41.559 ; J1.6@-5.227,42.042 ccw(c-3.983,42.042) v1@-4.862,41.162 ; J1.6@-5.227,42.445 -5.227,34.36 -2.87,32.004 5.563,32.004 6.858,30.709 6.858,30.355 6.858,25.273 6.858,24.943 ; C0.1@-5.156,19.247 -3.955,19.247 C8.2@-3.941,19.261 ; -2.972,4.601 ccw(c-2.972,5.14) v1(-2.511,4.862) -2.771,4.601 ; v1@-2.707,4.82 cw(c-2.94,4.77) -2.771,4.601 ; v1@-2.682,4.965 cw(c-3.327,5.355) Q4.3@-3.327,4.601 -2.771,4.601 ; v1@-2.553,4.666 ccw(c-2.603,4.433) -2.771,4.601 ; J1.5@-1.402,42.145 -1.402,39.624 C29.2@-1.372,39.624 ; Q9.3@4.273,4.601 4.873,4.601 ; v1@5.13,4.882 cw(c4.782,4.849) 5.029,4.601 ; v1@5.173,4.701 v1@5.129,4.701 ; v1@5.31,4.702 ccw(c5.277,4.354) 5.029,4.601 ; v1(5.329,4.901) v1@5.129,4.701 ; Q10.3@8.673,4.601 9.273,4.601 ; v1@9.374,4.882 cw(c9.026,4.849) 9.273,4.601 ; v1@9.554,4.702 ccw(c9.521,4.354) 9.273,4.601 ; v1(9.573,4.901) 9.273,4.601 ; 10.17,21.642 13.321,18.49 13.971,17.84 U4.Vss@13.971,11.616 ; v1@13.695,9.855 cw(c13.03,9.189) 13.971,9.189 ; v1@13.695,10.137 ccw(c13.03,10.803) U4.Vss@13.971,10.803 ; v1@13.748,8.68 cw(c13.211,8.142) v1@13.971,8.142 ; v1@13.748,8.962 ccw(c13.211,9.5) 13.971,9.5 ; v1@13.766,7.86 cw(c13.273,7.366) v1@13.971,7.366 ; v1@13.766,8.143 ccw(c13.273,8.636) v1@13.971,8.636 ; v1@13.824,7.477 ccw(c13.646,7.641) 13.88,7.704 ccw(c14.131,7.771) v1@14.041,7.528 ; v1@13.829,8.185 ccw(c13.77,8.321) 13.913,8.359 ; v1@13.83,7.199 cw(c13.488,6.858) 13.971,6.858 cw(c14.454,6.858) v1@14.112,7.199 ; v1@13.83,7.482 ccw(c13.488,7.824) 13.971,7.824 ccw(c14.454,7.824) v1@14.112,7.482 ; 13.971,7.671 cw(c14.238,7.671) v1@14.049,7.86 ; 13.971,8.332 ccw(c14.238,8.332) v1@14.049,8.143 ; 13.971,9.672 ccw(c13.513,9.672) v1(13.837,9.996) ccw(c13.513,10.32) 13.971,10.32 ; C15.1@14.746,5.462 13.971,6.237 v1(13.971,7.341) U4.Vss@13.971,11.616 ; C16.2@15.025,7.566 14.975,7.616 14.521,7.616 14.521,11.066 U4.Vss@13.971,11.616 ; 4.873,4.601 4.973,4.701 v1@5.129,4.701 ; 4.873,4.601 5.029,4.601 ; 5.029,4.601 v1@5.129,4.701
  Top Layer w2: v1(1.168,0.432) 2.718,1.981 12.167,1.981 13.616,3.43 13.616,11.904 13.321,12.198 13.321,18.49 13.321,18.81 13.321,21.198 8.256,26.263 8.256,28.957 6.858,30.355 6.631,30.582 4.953,30.582 ; 1.245,30.582 4.953,30.582 ; 6.858,25.273 5.486,26.645 5.486,30.048 4.953,30.582
  other v1: 1.61,-0.584 -1.402,-0.564 -0.413,-0.406 -1.371,0.239 2.311,0.356 3.099,0.356 -0.635,0.383 0.219,0.406 -7.29,0.784 -6.198,0.849 -4.902,0.914 -0.305,1.196 -1.27,1.22 0.682,1.22 1.715,1.223 3.122,1.223 8.433,1.321 7.29,1.346 5.91,1.397 4.699,1.427 -19.821,1.651 -7.417,1.789 -5.995,1.803 -4.703,1.789 -8.345,2.083 3.103,2.108 4.293,2.25 8.738,2.286 5.385,2.311 6.541,2.311 -9.382,2.339 7.633,2.337 -20.599,3.937 -19.228,3.962 -4.813,4.461 -0.174,4.775 1.83,4.796 2.631,4.826 13.329,6.223 14.845,6.616 -14.834,6.883 -13.857,6.916 13.329,7.011 -15.773,7.188 4.073,7.461 13.908,8.001 -1.178,8.332 13.89,8.821 -1.921,8.858 -0.938,9.112 -13.564,12.192 5.74,12.592 8.39,12.7 3.251,17.338 3.446,18.155 -4.398,19.654 -6.858,20.101 -8.738,20.295 6.629,20.786 -2.692,36.957 -4.743,36.982 -3.607,36.982 -5.817,37.008 -5.842,38.202 -4.928,38.379 -4.242,38.506 -3.424,38.532 -2.568,38.532 -6.02,41.013 -3.912,41.021 -2.845,41.021
GREEN: R40.2 U3.11 | length 64.6
  Top Layer w0.2: R40.2@-21.761,0.299 -23.254,0.299 -23.591,0.635 -23.591,7.515 -22.262,8.843 -20.723,8.843 -18.759,10.807 -18.759,12.155 -19.669,13.065 -19.669,13.272 ccw(c-21.103,18.271) -15.915,18.619 ; -15.911,18.63 cw(c0.004,0.003) -10.906,21.94 ; -10.902,21.935 -10.882,21.935 -7.899,24.917 -4.089,24.917 -3.685,24.513 -2.701,24.513 -2.057,23.869 -0.095,23.869 0.305,23.47 0.305,15.843 0,15.538 -2.591,15.538 -2.847,15.282 -2.847,14.038 -3.227,13.658 -7.539,13.658 -8.407,12.789 -8.407,10.597 U3.11@-8.447,10.558